# EAGLE board FM Towns Pico Adapter (EAGLE 9.0.1)
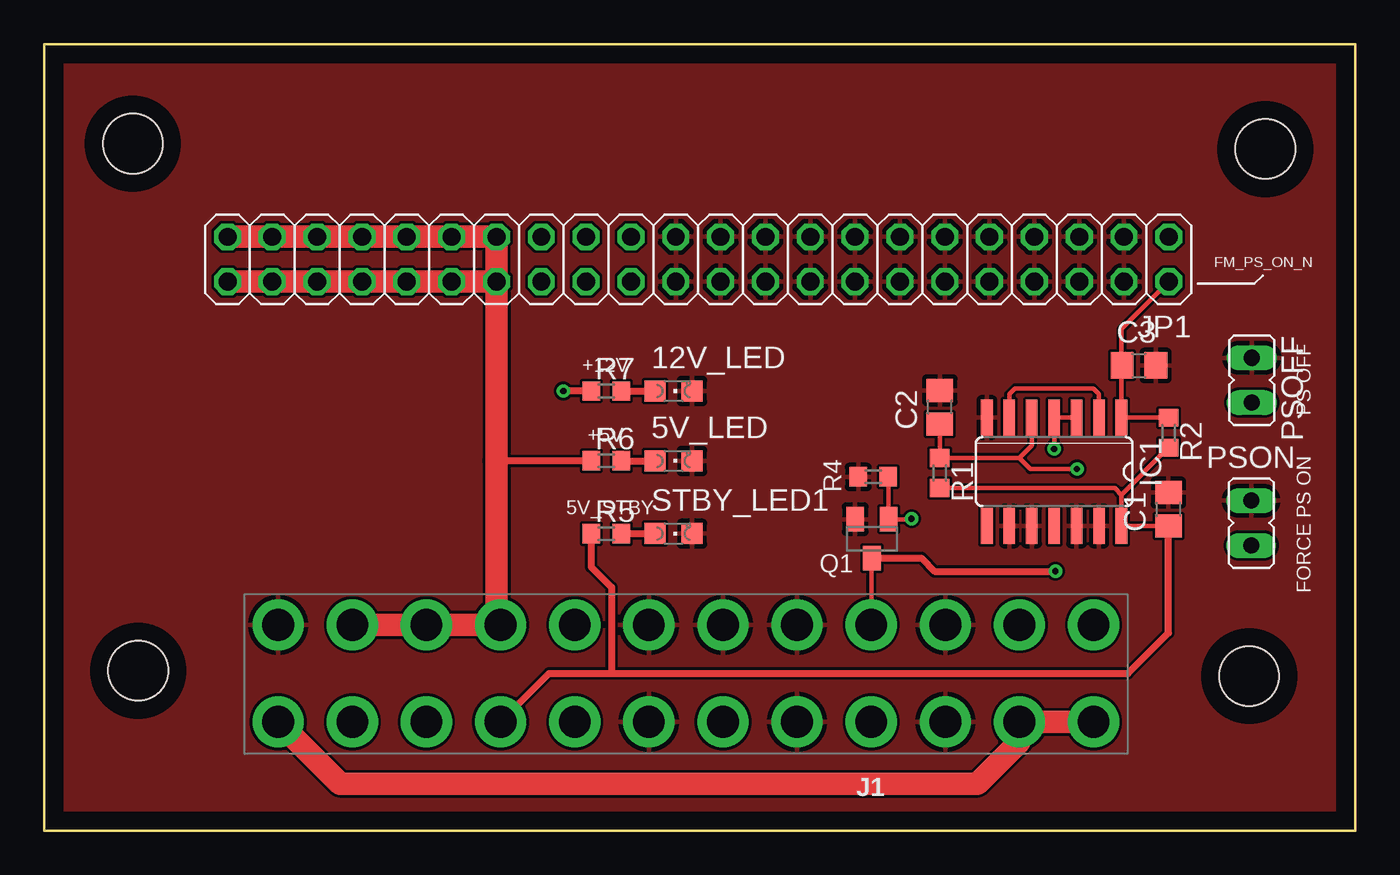
[diagram p0: board, top side]
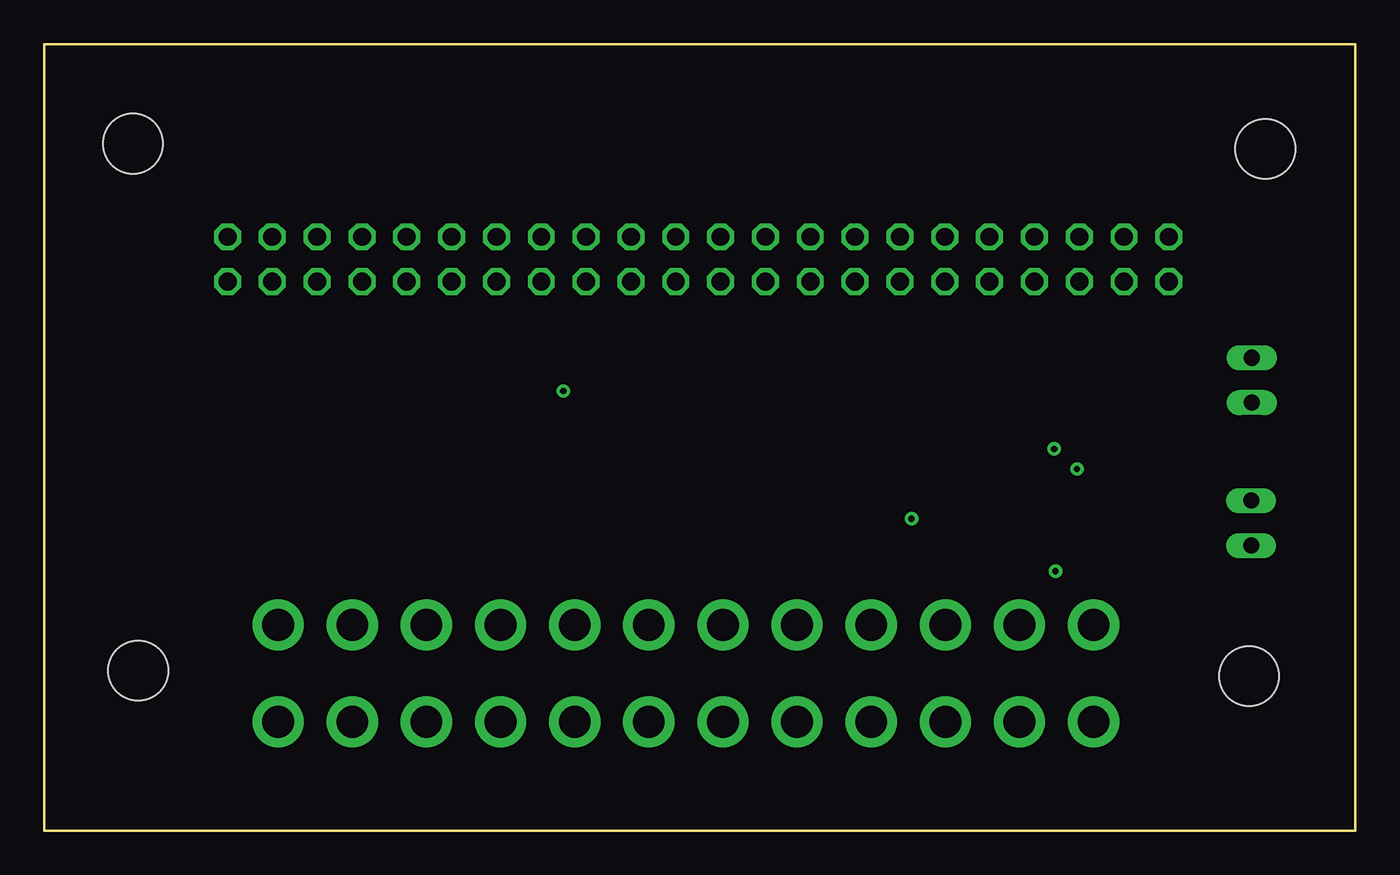
[diagram p1: board, inner layer Route2]
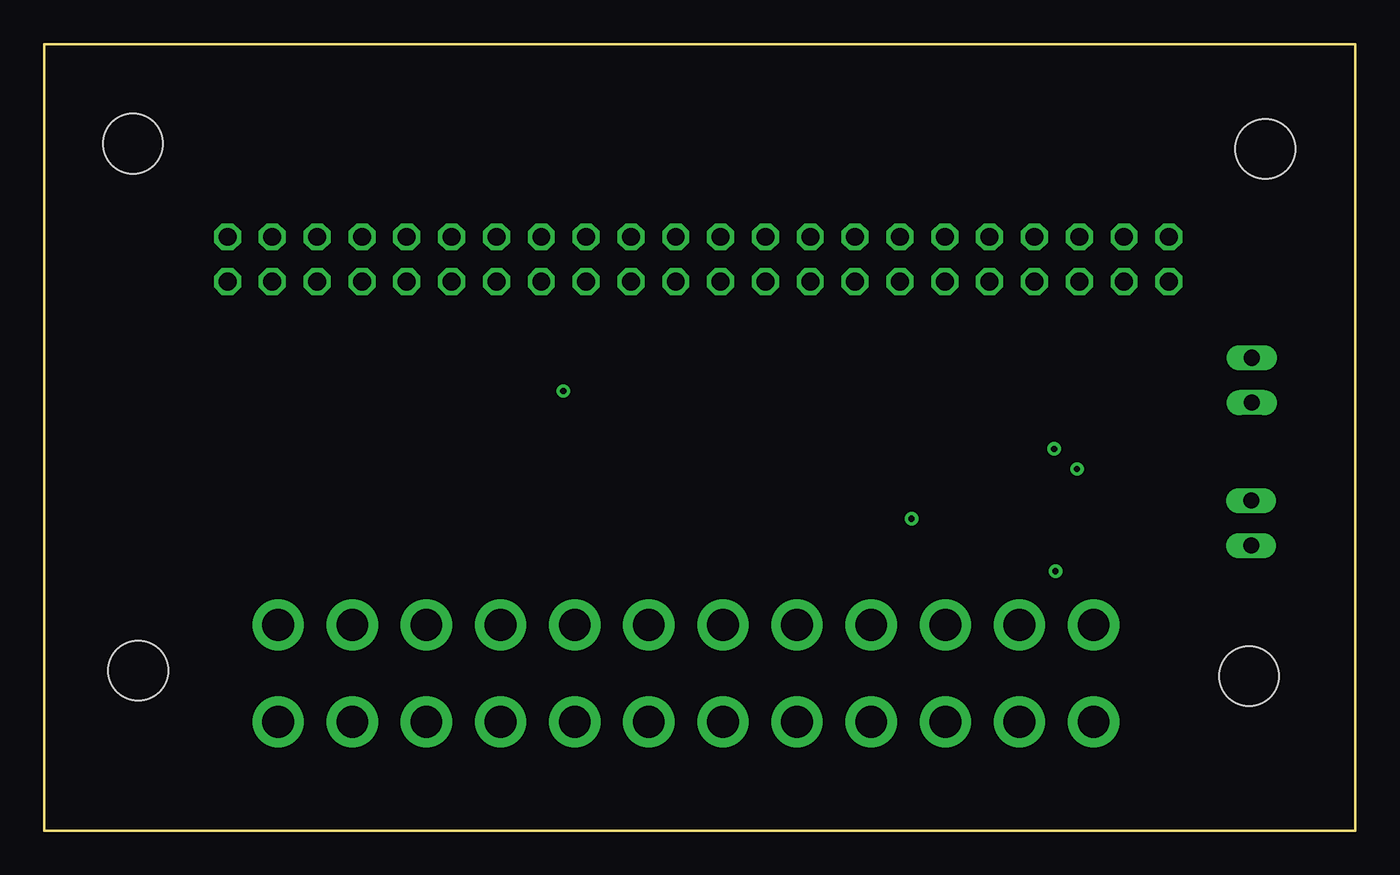
[diagram p2: board, inner layer Route15]
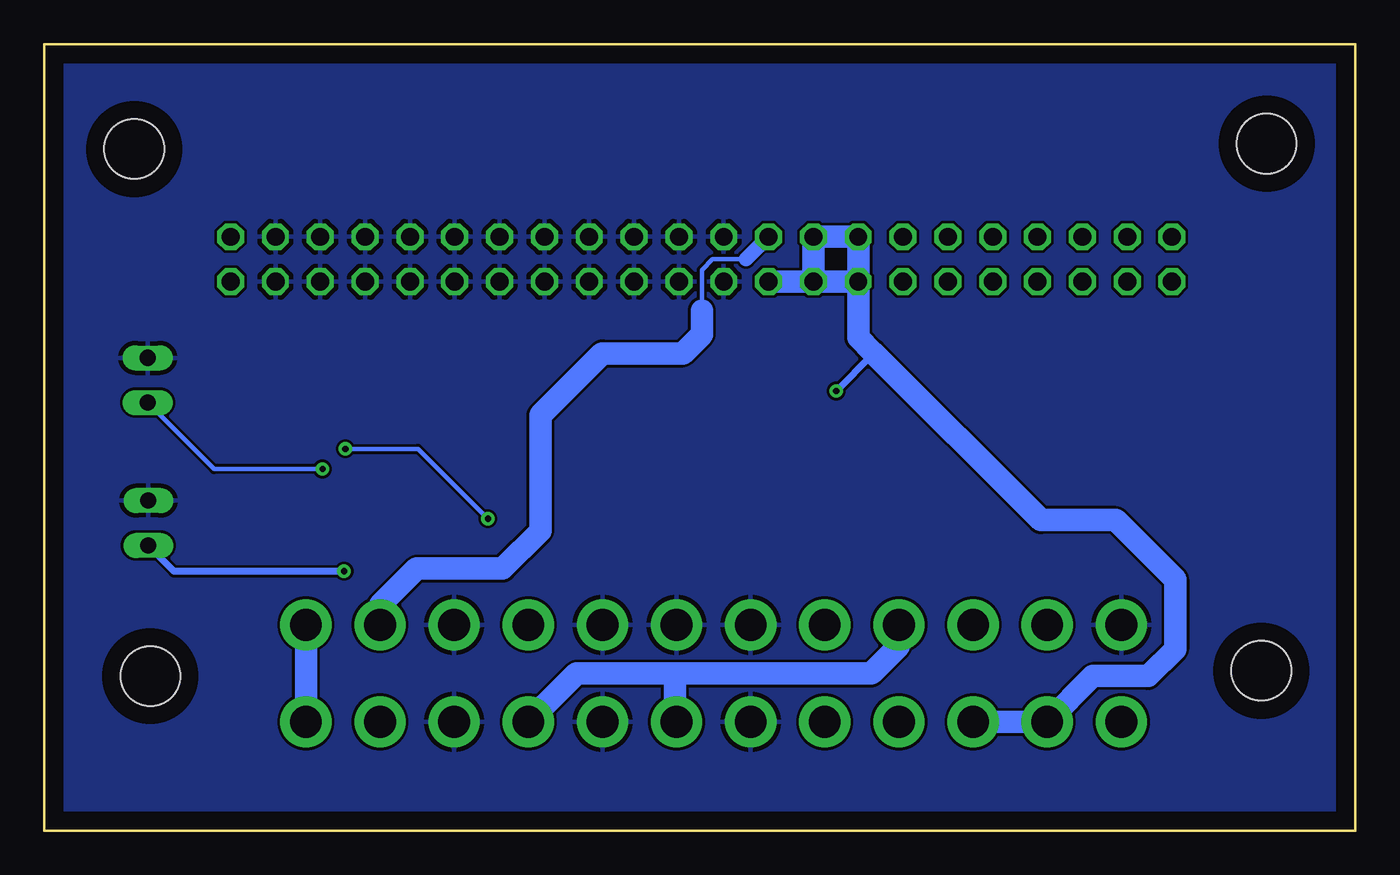
[diagram p3: board, bottom side, seen from below]

Size 74.3 x 44.58 mm. Coordinates in mm from the lower left corner, seen from the top.
Outline: 74.29,44.58 74.29,0 0,0 0,44.58 74.29,44.58
Copper layers (1*16): Top 0.035mm / dielectric 1.5mm / Bottom 0.035mm
Design rules "default *": minimum track width 6mil, minimum drill 13mil, track to track 6mil, track to pad 6mil, pad to pad 6mil, via to via 6mil, smd to smd 6mil, copper to edge 40mil, drill to drill 8mil, minimum pad ring 10mil, minimum via ring 8mil, stop-mask expansion 4mil, vias tented up to drill 0mil, thermal gap 10mil
Holes 3.4 mm at 68.28,8.76 5.33,9.07 5.03,38.94 69.19,38.63

## Footprints (pad centres in the part's own frame; a part is rotated, then mirrored left to right if it is on the bottom)
CHIPLED_0805 = smd 1.2 x 1.2: A 0,-1.05; C 0,1.05
C0805 = smd 1.3 x 1.5: 1 -0.95,0; 2 0.95,0
SO14 = smd 0.66 x 2.032: 1 -3.81,-3.073; 2 -2.54,-3.073; 3 -1.27,-3.073; 4 0,-3.073; 5 1.27,-3.073; 6 2.54,-3.073; 7 3.81,-3.073; 8 3.81,3.073; 9 2.54,3.073; 10 1.27,3.073; 11 0,3.073; 12 -1.27,3.073; 13 -2.54,3.073; 14 -3.81,3.073
ATX24_RIGHT_ANGLE = drill 1.8 pad 2.9: 1 23.1,4.76; 2 18.9,4.76; 3 14.7,4.76; 4 10.5,4.76; 5 6.3,4.76; 6 2.1,4.76; 7 -2.1,4.76; 8 -6.3,4.76; 9 -10.5,4.76; 10 -14.7,4.76; 11 -18.9,4.76; 12 -23.1,4.76; 13 23.1,10.26; 14 18.9,10.26; 15 14.7,10.26; 16 10.5,10.26; 17 6.3,10.26; 18 2.1,10.26; 19 -2.1,10.26; 20 -6.3,10.26; 21 -10.5,10.26; 22 -14.7,10.26; 23 -18.9,10.26; 24 -23.1,10.26
2X22 = drill 1.016 octagon: 1 -25.4,-1.27; 2 -25.4,1.27; 3 -22.86,-1.27; 4 -22.86,1.27; 5 -20.32,-1.27; 6 -20.32,1.27; 7 -17.78,-1.27; 8 -17.78,1.27; 9 -15.24,-1.27; 10 -15.24,1.27; 11 -12.7,-1.27; 12 -12.7,1.27; 13 -10.16,-1.27; 14 -10.16,1.27; 15 -7.62,-1.27; 16 -7.62,1.27; 17 -5.08,-1.27; 18 -5.08,1.27; 19 -2.54,-1.27; 20 -2.54,1.27; 21 0,-1.27; 22 0,1.27; 23 2.54,-1.27; 24 2.54,1.27; 25 5.08,-1.27; 26 5.08,1.27; 27 7.62,-1.27; 28 7.62,1.27; 29 10.16,-1.27; 30 10.16,1.27; 31 12.7,-1.27; 32 12.7,1.27; 33 15.24,-1.27; 34 15.24,1.27; 35 17.78,-1.27; 36 17.78,1.27; 37 20.32,-1.27; 38 20.32,1.27; 39 22.86,-1.27; 40 22.86,1.27; 41 25.4,-1.27; 42 25.4,1.27; 43 27.94,-1.27; 44 27.94,1.27
JP1 = drill 0.914 long: 1 0,-1.27; 2 0,1.27
SOT23 = smd 1 x 1.4: 1 -0.95,-1.1; 2 0.95,-1.1; 3 0,1.1
R0603 = smd 1 x 1.1: 1 -0.85,0; 2 0.85,0

## Placement (x,y rotation side)
5V_LED  [CHIPLED_0805]  35.66,20.95 270 top
12V_LED  [CHIPLED_0805]  35.66,24.92 270 top
C1  100nF  [C0805]  63.7,18.21 90 top
C2  100nF  [C0805]  50.75,24 90 top
C3  100nF  [C0805]  62.03,26.37 0 top
IC1  74HC00D  [SO14]  57.23,20.35 180 top
J1  ATX24RH  [ATX24_RIGHT_ANGLE]  36.36,1.41 0 top
JP1  [2X22]  38.33,32.38 180 top
PSOFF  [JP1]  68.43,25.53 180 top
PSON  [JP1]  68.39,17.43 0 top
Q1  BC847  [SOT23]  46.9,16.55 180 top
R1  1K  [R0603]  50.75,20.27 270 top
R2  1K  [R0603]  63.7,22.56 270 top
R4  1K  [R0603]  46.98,20.06 0 top
R5  220R  [R0603]  31.85,16.84 0 top
R6  220R  [R0603]  31.85,20.95 0 top
R7  680R  [R0603]  31.85,24.92 0 top
STBY_LED1  [CHIPLED_0805]  35.66,16.84 270 top

## Library data of the parts
5V_LED 12V_LED STBY_LED1 = led
C1-C3 = rcl; SPICEPREFIX: C
IC1 = 74xx-eu
J1 = SparkFun-Connectors; PROD_ID: CONN-09674; SF_ID: PRT-09498
JP1 = pinhead
PSOFF PSON = jumper
Q1 = transistor-npn
R1 R2 R4-R7 = rcl

## Nets
5V_STBY: C1.1 IC1.14 J1.9 R1.2 R2.2 R5.1
12V_STBY?: JP1.1
+3V3: J1.1 J1.2 J1.12 J1.13
+5V: J1.4 J1.6 J1.21 J1.22 J1.23 JP1.31 JP1.32 JP1.33 JP1.34 JP1.35 JP1.36 JP1.37 JP1.38 JP1.39 JP1.40 JP1.41 JP1.42 JP1.43 JP1.44 R6.1
+12V: J1.10 J1.11 JP1.26 JP1.27 JP1.28 JP1.29 JP1.30 R7.1
-12V: J1.14 JP1.25
ATX_PS_ON_N: J1.16 PSON.1 Q1.3
FM_PS_OFF_N: C2.1 IC1.5 PSOFF.2 R1.1
FM_PS_ON_N: C3.1 IC1.1 JP1.2 R2.1
GND: 5V_LED.C 12V_LED.C C1.2 C2.2 C3.2 IC1.7 IC1.9 IC1.10 IC1.12 IC1.13 J1.3 J1.5 J1.7 J1.15 J1.17 J1.18 J1.19 J1.24 JP1.3 JP1.4 JP1.5 JP1.6 JP1.7 JP1.8 JP1.9 JP1.10 JP1.11 JP1.12 JP1.13 JP1.14 JP1.15 JP1.16 JP1.17 JP1.18 JP1.19 JP1.20 JP1.21 JP1.22 JP1.23 JP1.24 PSOFF.1 PSON.2 Q1.2 R4.1 STBY_LED1.C
N$2: IC1.2 IC1.6
N$3: R5.2 STBY_LED1.A
N$4: 5V_LED.A R6.2
N$5: 12V_LED.A R7.2
PS_ON_TTL: IC1.3 IC1.4 Q1.1 R4.2

## Tracks (layer width: path | path; a pad name or v marks a point on that pad's centre or on a via)
5V_STBY
  Top 0.254: C1.1 61.04,17.26 IC1.14 61.04,19.04 | R2.2 61.04,19.04 | R1.2 60.65,19.42 61.04,19.04
  Top 0.406: J1.9 28.61,8.92 32.16,8.92 | C1.1 63.7,11.2 61.42,8.92 32.16,8.92 | R5.1 31,14.95 32.16,13.79 32.16,8.92
+3V3
  Top 1.27: J1.12 16.76,2.67 52.88,2.67 55.26,5.05 J1.2 J1.1
  Bottom 1.27: J1.1 J1.13
+5V
  Top 0.406: R6.1 25.63,20.95
  Top 1.27: JP1.32 25.63,20.95 25.63,11.9 J1.21 J1.22 J1.23 | JP1.44 JP1.42 JP1.40 JP1.38 JP1.36 JP1.34 JP1.32 | JP1.32 JP1.31 JP1.33 JP1.35 JP1.37 JP1.39 JP1.41 JP1.43
  Bottom 1.27: J1.21 25.86,10.49 27.43,8.92 38.56,8.92 | J1.4 44.12,8.92 38.56,8.92 | J1.6 38.56,6.26 38.56,8.92
+12V  (via drill 0.35)
  Top 0.406: R7.1 v29.41,24.92
  Bottom 0.406: v29.41,24.92 27.36,26.97 27.36,27.13
  Bottom 1.27: JP1.30 JP1.29 JP1.27 JP1.28 | JP1.28 JP1.30 | JP1.26 JP1.28 | J1.10 J1.11 14.87,8.76 11.73,8.76 10.21,10.29 10.21,14.25 13.56,17.6 17.83,17.6 27.36,27.13 28.17,27.94 JP1.30
-12V
  Bottom 0.254: 34.52,32.38 36.42,32.38 37.03,31.78 37.03,29.49
  Bottom 0.813: JP1.25 34.52,32.38
  Bottom 1.27: J1.14 55.26,12.78 53.19,14.86 48.31,14.86 46.18,16.99 46.18,23.55 42.67,27.05 38.1,27.05 37.03,28.12 37.03,29.49
ATX_PS_ON_N  (via drill 0.35)
  Top 0.254: J1.16 46.86,15.41 Q1.3
  Top 0.406: Q1.3 49.7,15.45 50.44,14.71 v57.3,14.71
  Bottom 0.406: v57.3,14.71 66.93,14.71 PSON.1
FM_PS_OFF_N  (via drill 0.35)
  Top 0.254: IC1.5 55.96,21.82 55.26,21.12 | 55.26,21.12 R1.1 C2.1 | v58.52,20.5 55.88,20.5 55.26,21.12
  Bottom 0.254: v58.52,20.5 64.67,20.5 PSOFF.2
FM_PS_ON_N
  Top 0.254: R2.1 61.04,23.41 IC1.1 61.04,26.32 | 61.04,26.32 C3.1 | JP1.2 61.04,28.42 61.04,26.32
GND
  pour Route2: 54.46,-105.64 54.46,-174.22 -58.57,-174.22 -58.57,-105.56
  pour Route15: 54.46,-105.64 54.46,-174.22 -58.57,-174.22 -58.57,-105.64
  pour Route2: -61.37,-227.34 61.51,-227.34 61.51,-308.23 57.18,-308.23 57.18,-308.95 -57.59,-308.95 -57.59,-308.23 -61.37,-308.23
  pour Route15: -61.37,-227.34 61.51,-227.34 61.51,-308.23 57.18,-308.23 57.18,-308.95 -57.59,-308.95 -57.59,-308.23 -61.37,-308.23
  pour Top: 74.3,44.58 74.3,0 0,0 0,44.58
  pour Bottom: 74.3,44.58 74.3,0 0,0 0,44.58
N$2
  Top 0.254: IC1.2 59.77,24.74 59.44,25.07 55.02,25.07 54.69,24.74 IC1.6
N$3
  Top 0.406: R5.2 STBY_LED1.A
N$4
  Top 0.406: R6.2 5V_LED.A
N$5
  Top 0.406: R7.2 12V_LED.A
PS_ON_TTL  (via drill 0.35)
  Top 0.254: IC1.3 IC1.4 v57.23,21.64 | v49.15,17.68 49.12,17.65 Q1.1 47.85,20.03 R4.2
  Bottom 0.254: v57.23,21.64 53.11,21.64 v49.15,17.68

## Text on the board
tPlace: FM_PS_ON_N | +12V | PS OFF | +5V | 5V_STBY | FORCE PS ON
Muster: USB | ISP | PWR
Patch_Top: 3.2mm | 2.2mm | 3.2mm